# Altium PCB PCB1_DEC17.pcbdoc (part 2 of 2)
Units mil, origin at the board's own origin, x right, y up, seen from the top; angles counter-clockwise.
Board outline 5000 x 5000 mil, 2 copper layers (Top Layer, Bottom Layer); 78 components, 60 nets, 282 pads, 32 vias.
Unrouted connection lines stored in the file: 84.
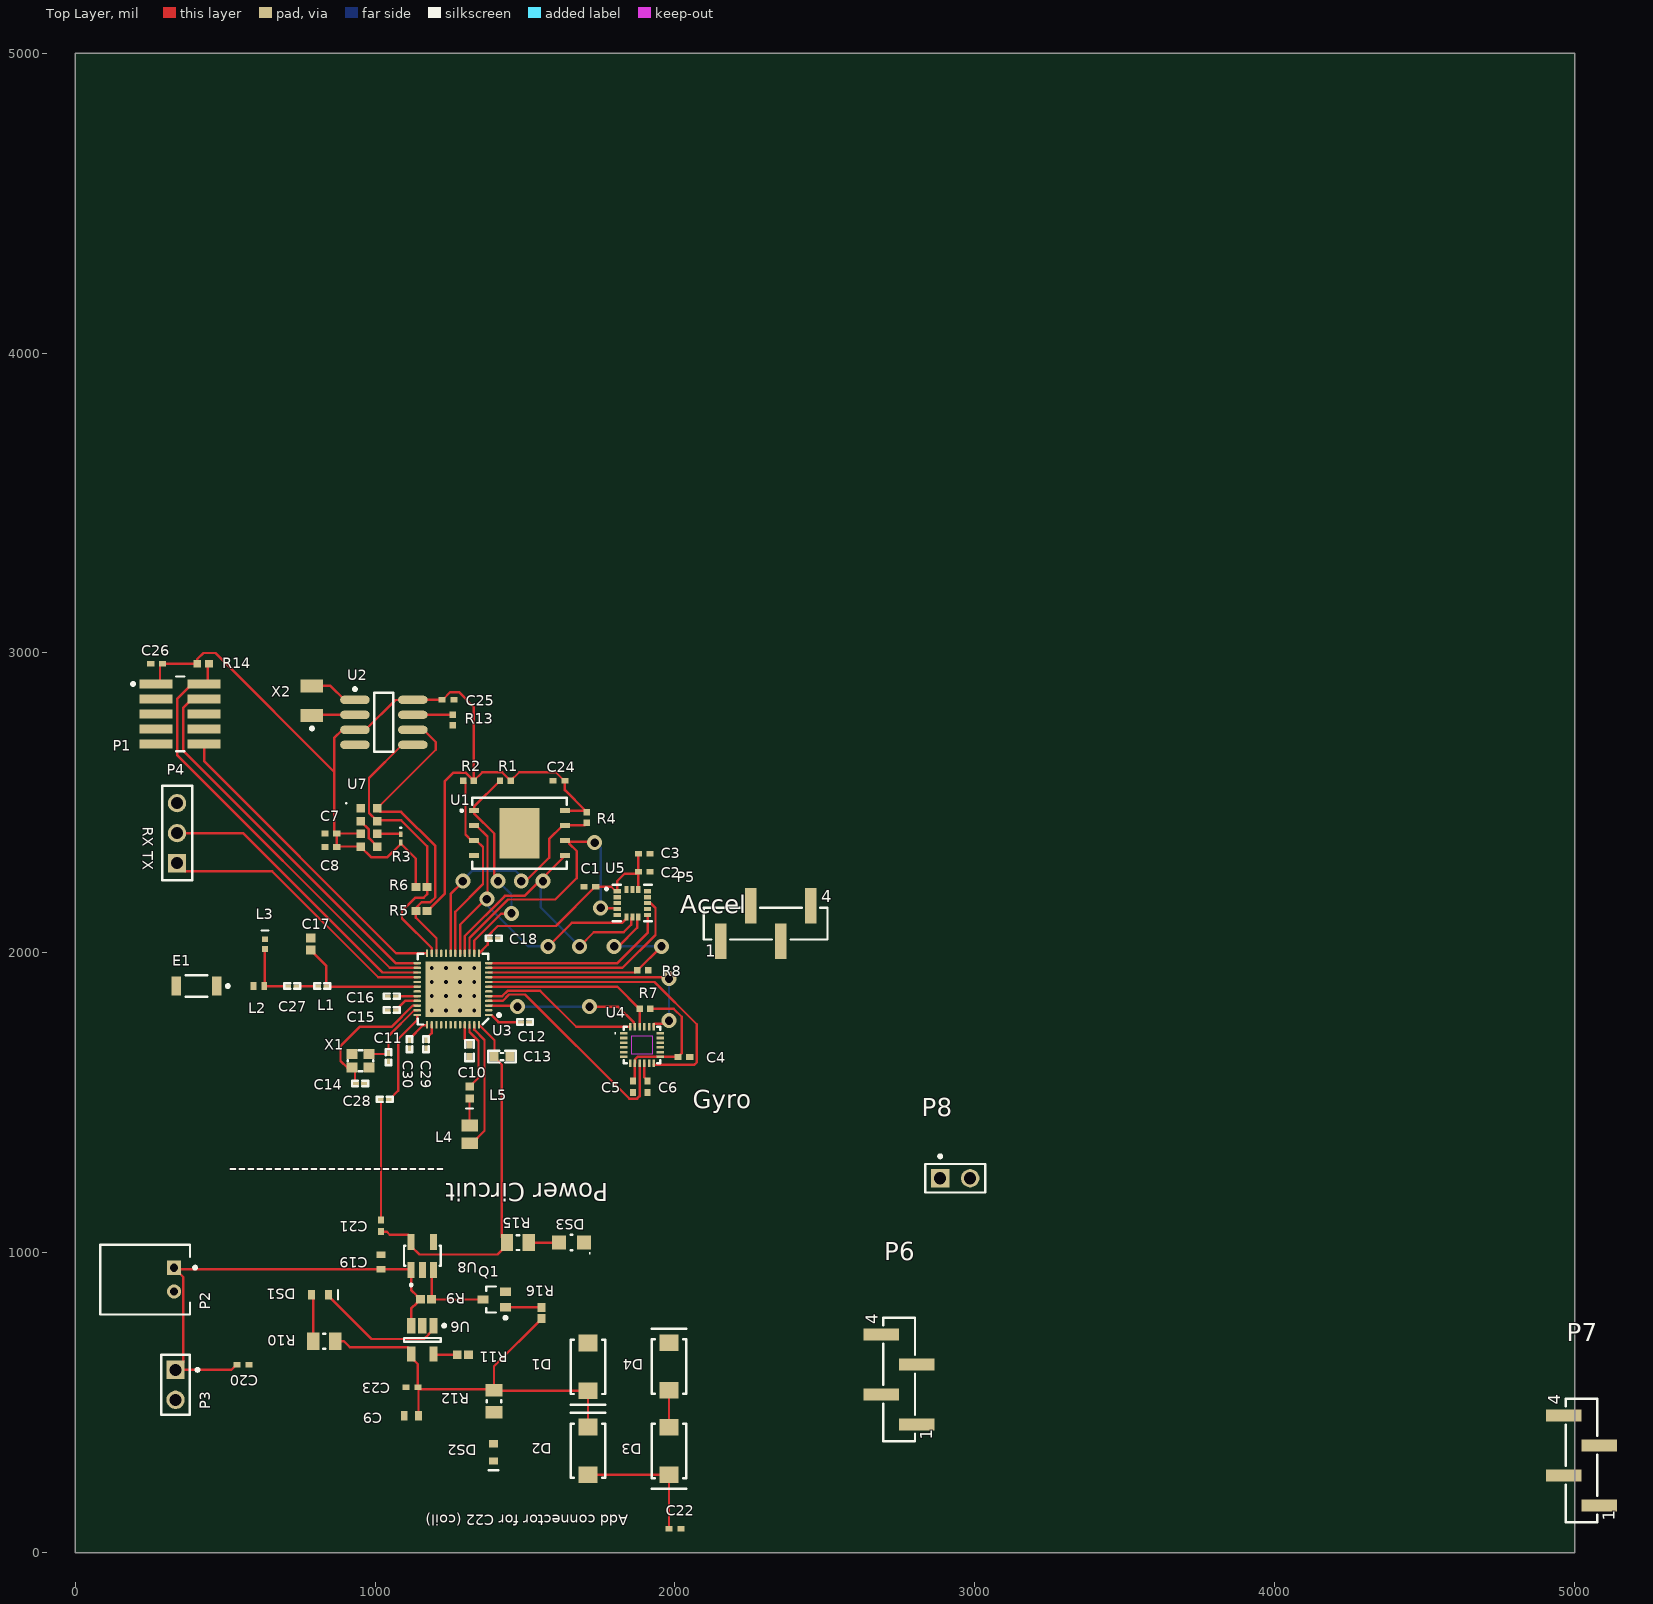
[diagram p0: Top Layer view]

## Via types
v1: diameter 50, hole 28, Top Layer to Bottom Layer, 16 vias
v2: diameter 25.98, hole 12.99, Top Layer to Bottom Layer, 16 vias

## Nets (pads, with @x,y where several pads share a name; then routed paths per layer and width w, separated by ;. In a path a pad name is that pad's centre, name@x,y a point inside that pad or via, vN(x,y) a via of type N, cw(c..) or ccw(c..) an arc to the next point about the centre after c; other vN are vias at no path point) (continued)
copper on no net: (continued)
  other v2: 1189.13,1808.44 1236.38,1808.44 1283.62,1808.44 1330.87,1808.44 1189.13,1855.69 1236.38,1855.69 1283.62,1855.69 1330.87,1855.69 1189.13,1902.93 1236.38,1902.93 1283.62,1902.93 1330.87,1902.93 1189.13,1950.18 1236.38,1950.18 1283.62,1950.18 1330.87,1950.18

## Silkscreen, mask and mechanical layers (free items; w line width, h text height)
Top Overlay:
  text "RX TX" at 225,2420 h35 r270
  text "Accel" at 2017.5,2132.5 h60
  text "Gyro" at 2060,1482.5 h60
  text "------------------------" at 512.5,1257.5 h60
  text "Power Circuit" at 1777.5,1232.5 h60 r180
  text "Add connector for C22 (coil)" at 1845,126.81 h35 r180

## Text inside footprints (layer, text, board x,y; h text height)
P5: Top Overlay "4" at 2487.54,2168.35 h40; Top Overlay "1" at 2101.71,1987.24 h40
P6: Top Overlay "4" at 2676.63,762.54 h40 r90; Top Overlay "1" at 2857.74,376.71 h40 r90
P7: Top Overlay "4" at 4951.63,492.54 h40 r90; Top Overlay "1" at 5132.74,106.71 h40 r90